# Altium PCB lab_2_pankov_boost.PcbDoc
Units mm, origin at the board's own origin, x right, y up, seen from the top; angles counter-clockwise.
Board outline 50 x 25 mm, 2 copper layers (Top Layer, Bottom Layer), stack 1.57 mm thick; 33 components, 20 nets, 92 pads, 97 vias.
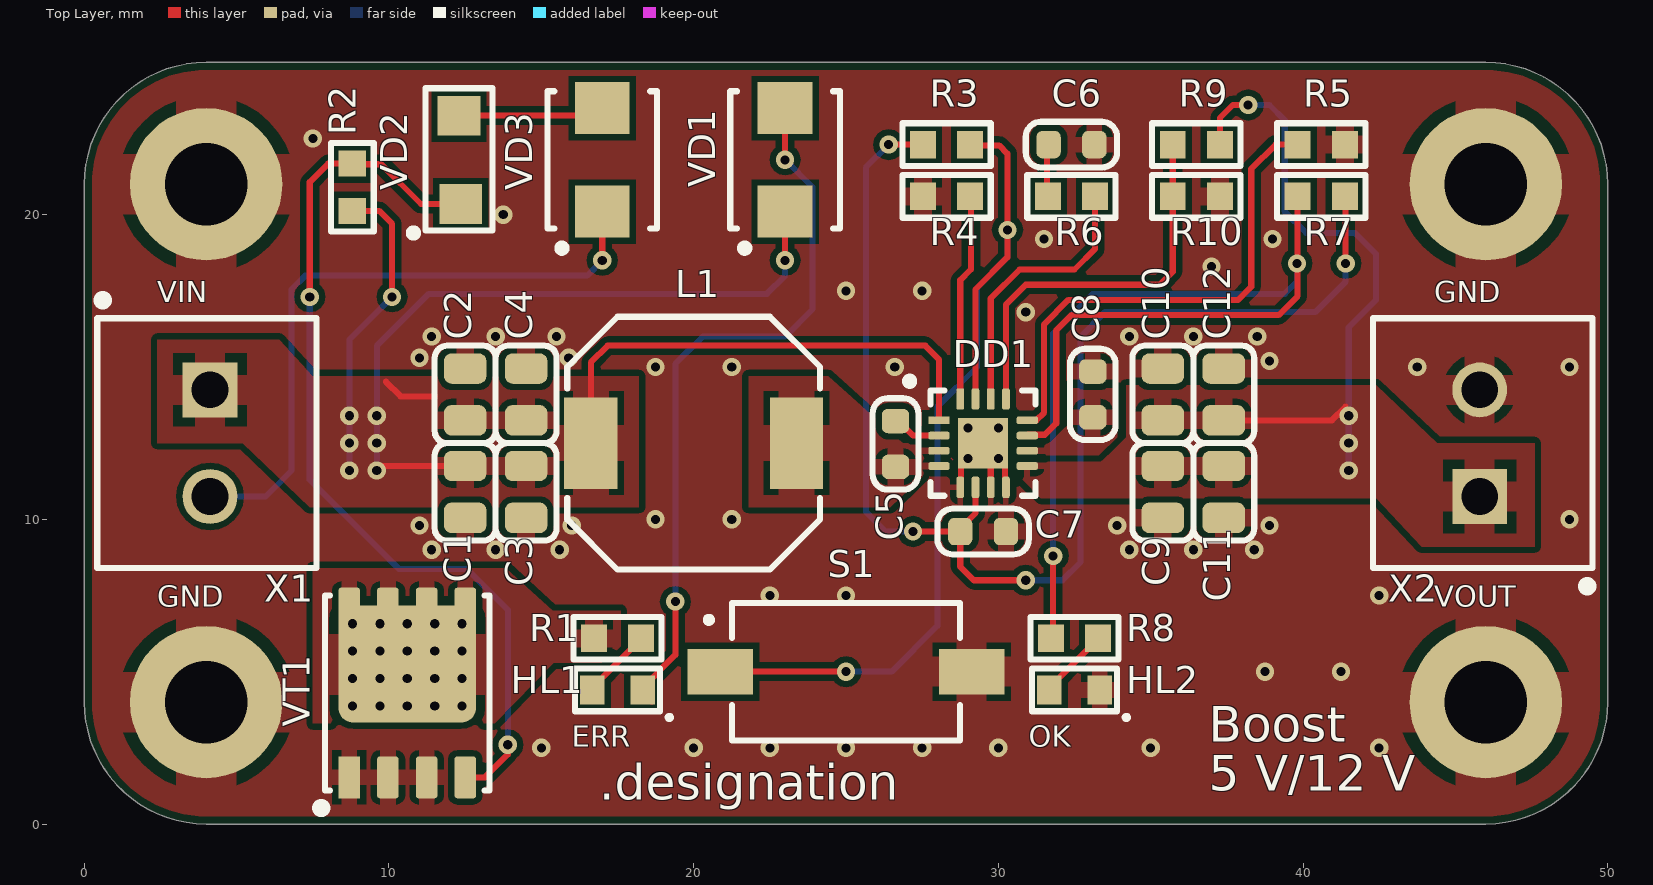
[diagram p0: Top Layer view]
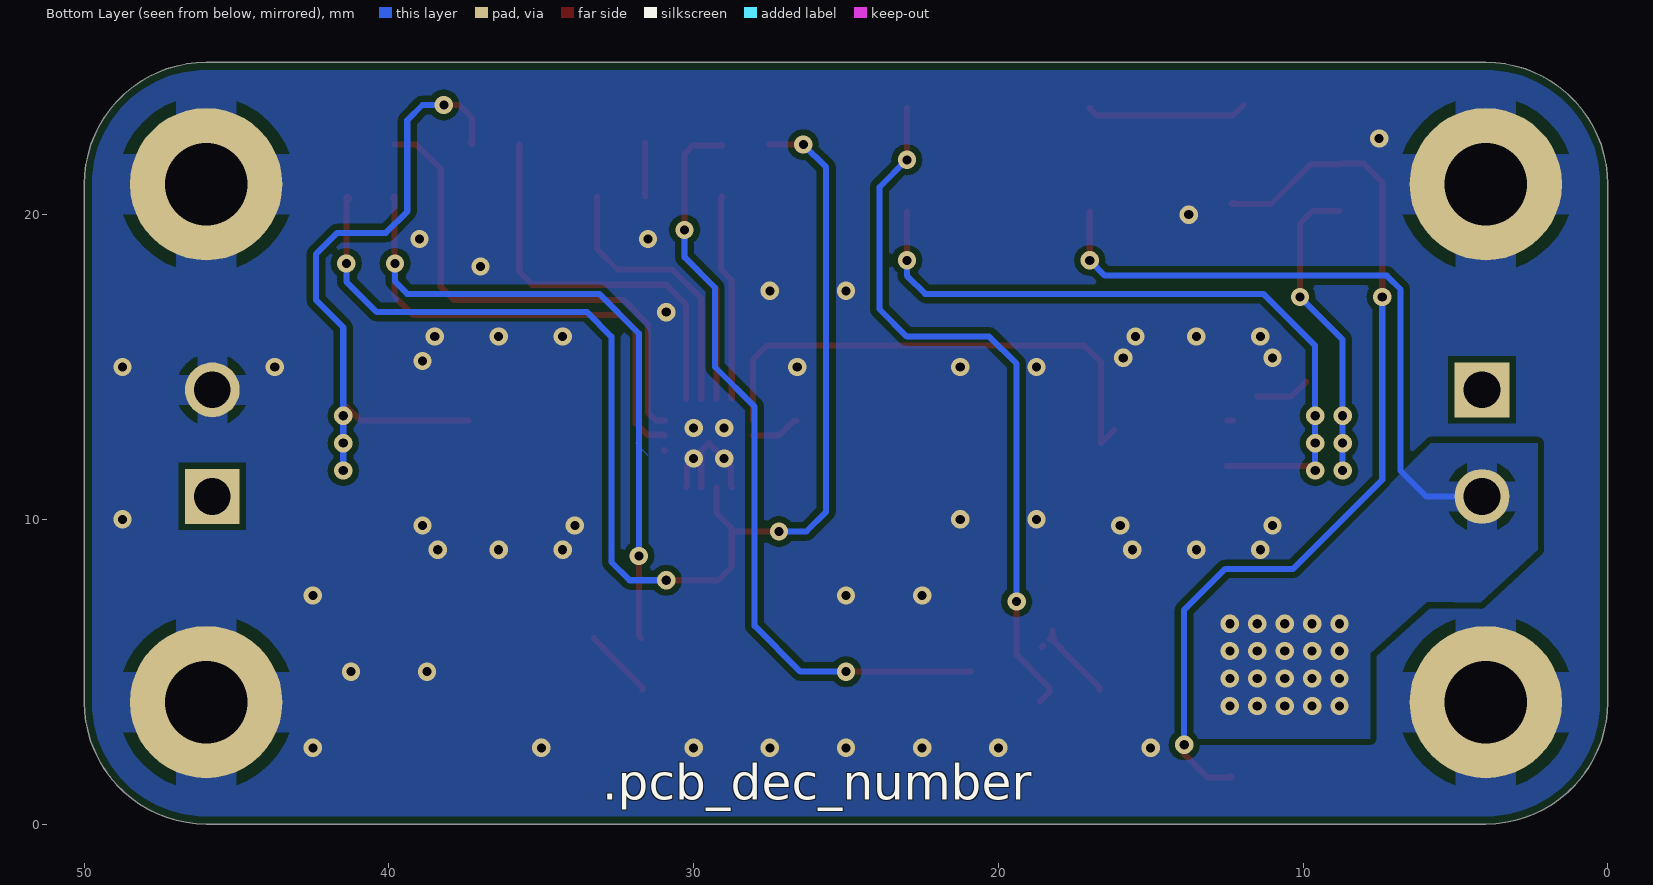
[diagram p1: Bottom Layer view, seen from below]
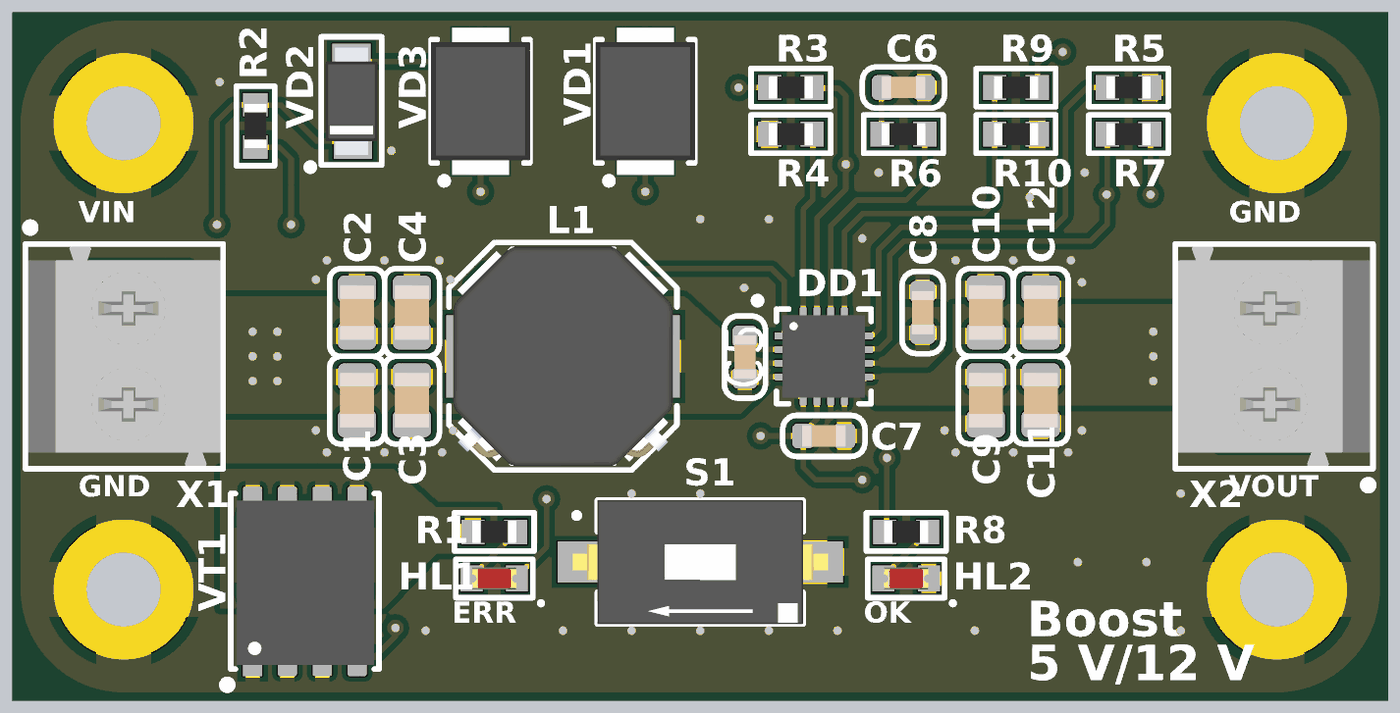
[diagram p2: 3D render of the assembled board from above, using the file's embedded part models]

## Layer stack, top to bottom
Top Solder: solder mask 0.0102, Solder Resist, Dk 3.5
Top Layer: signal copper 0.035
Core 1: core 1.5, FR4, Dk 4.6
Bottom Layer: signal copper 0.035
Bottom Solder: solder mask 0.0102, Solder Resist, Dk 3.5

## Board outline
4,0 cw(c4,4) 0,4 0,21 cw(c4,21) 4,25 46,25 cw(c46,21) 50,21 50,4 cw(c46,4) 46,0

## Design rules (kind name [scope] priority, off if disabled: settings)
AcuteAngle min_acute_angle [OnCopper] p1: minimum=3.50000000000000E+0001 checktracksonly=FALSE // Минимальный угол между примитивами топологии
BoardOutlineClearance board_outline_clearance_std [NOT (OnLayer('Bottom Overlay') OR OnLayer('Top Overlay'))] p1: gap=0.25 ignorepadtopadclearanceinfootprint=FALSE except(0: Arc-SplitContinuation Track-SplitContinuation SMDPad-SplitContinuation THPad-SplitContinuation Via-SplitContinuation Fill-SplitContinuation Poly-SplitContinuation Region-SplitContinuation Text-SplitContinuation) // Отступ элементов топологии от края фрезеруемой печатной платы
Clearance clearance_outer_35um_std [OnTopLayer OR OnBottomLayer] p1: gap=0.2 ignorepadtopadclearanceinfootprint=TRUE except(0.25: Arc-Hole Track-Hole SMDPad-Hole THPad-Hole Via-Hole Fill-Hole Poly-Hole Region-Hole Text-Hole) // Зазоры на внешних слоях
Clearance clearance_inner_35um_std [NOT (OnTopLayer Or OnBottomLayer)] p2: gap=0.2 ignorepadtopadclearanceinfootprint=FALSE except(0.25: Arc-Hole Track-Hole SMDPad-Hole THPad-Hole Via-Hole Fill-Hole Poly-Hole Region-Hole Text-Hole) // Зазоры на внутренних слоях
ComponentClearance [All] p1: gap=0 collisioncheckmode=3 verticalgap=0 showdistances=FALSE
DiffPairsRouting diff_pairs_routing [All] p1: maxlimit=0.127 minlimit=0.127 mostfreqgap=0.127 toplayer_minwidth=0.143 toplayer_maxwidth=0.143 toplayer_prefwidth=0.143 bottomlayer_minwidth=0.143 bottomlayer_maxwidth=0.143 bottomlayer_prefwidth=0.143 impedanceprofiledriven=TRUE maxuncoupledlength=12.7 // Правила трассировки дифференциальных пар
HoleSize min_hole_size_std [IsPad] p1: absolutevalues=TRUE maxlimit=5.9 minlimit=0.6 maxpercent=80.000 minpercent=20.000 // Диаметр межслойного переходного отверстия
HoleSize min_hole_size_via_std [IsVia] p2: absolutevalues=TRUE maxlimit=5.9 minlimit=0.3 maxpercent=80.000 minpercent=20.000 // Минимальный диаметр монтажного отверстия
HoleToHoleClearance hole_to_hole_clearance_std [All] p1: gap=0.2 allowstackedmicrovias=FALSE // Минимальное расстояние между краями двух отверстий
MinimumAnnularRing min_via_ar_std [All] p1: minimumring=0.15 // Поясок площадки переходного отверстия (Annular ring VIA)
MinimumAnnularRing min_pad_ar_std [All] p2: minimumring=0.2 // Поясок монтажной контактной площадки (Annular ring PAD)
MinimumSolderMaskSliver min_solder_mask_bridge_std [All] p1: minsoldermaskwidth=0.15 // Мнимальная ширина масочного мостика
PlaneClearance plane_clearance_35um_std [All] p1: clearance=0.2 // Отступ полигона (для слоя plane) от элементов топологии
PlaneConnect [All] p1: planeconnectstyle=Relief reliefexpansion=0.5 reliefentries=4 reliefconductorwidth=0.2 reliefairgap=0.2
PolygonConnect poly_connect_to_pad<=0.3 [(AsMM(PadXSize_AllLayers)<=0.301) or (AsMM(PadYSize_AllLayers)<=0.301)] p1: thpad.connectstyle=Relief thpad.reliefconductorwidth=0.2 thpad.reliefentries=4 thpad.polygonreliefangle="90 Angle" thpad.airgapwidth=0.2 smdpad.connectstyle=Relief smdpad.reliefconductorwidth=0.2 smdpad.reliefentries=4 smdpad.polygonreliefangle="90 Angle" smdpad.airgapwidth=0.2 via.connectstyle=Direct via.reliefconductorwidth=0.254 via.reliefentries=4 via.polygonreliefangle="90 Angle" via.airgapwidth=0.254 // Правила подключения полигонов для падов от 0,3мм и меньше
PolygonConnect poly_connect_to_pad<=0.4 [(AsMM(PadXSize_AllLayers)<=0.401) or (AsMM(PadYSize_AllLayers)<=0.401)] p2: thpad.connectstyle=Relief thpad.reliefconductorwidth=0.26 thpad.reliefentries=4 thpad.polygonreliefangle="90 Angle" thpad.airgapwidth=0.2 smdpad.connectstyle=Relief smdpad.reliefconductorwidth=0.26 smdpad.reliefentries=4 smdpad.polygonreliefangle="90 Angle" smdpad.airgapwidth=0.2 via.connectstyle=Direct via.reliefconductorwidth=0.254 via.reliefentries=4 via.polygonreliefangle="90 Angle" via.airgapwidth=0.254 // Правила подключения полигонов для падов от 0,4 и меньше
PolygonConnect poly_connect_to_pad<=0.6 [(AsMM(PadXSize_AllLayers)<=0.601) or (AsMM(PadYSize_AllLayers)<=0.601)] p3: thpad.connectstyle=Relief thpad.reliefconductorwidth=0.33 thpad.reliefentries=4 thpad.polygonreliefangle="90 Angle" thpad.airgapwidth=0.2 smdpad.connectstyle=Relief smdpad.reliefconductorwidth=0.33 smdpad.reliefentries=4 smdpad.polygonreliefangle="90 Angle" smdpad.airgapwidth=0.2 via.connectstyle=Direct via.reliefconductorwidth=0.254 via.reliefentries=4 via.polygonreliefangle="90 Angle" via.airgapwidth=0.254 // Правила подключения полигонов для падов от 0,6мм и меньше
PolygonConnect poly_connect_to_pad<=0.7 [(AsMM(PadXSize_AllLayers)<=0.701) or (AsMM(PadYSize_AllLayers)<=0.701)] p4: thpad.connectstyle=Relief thpad.reliefconductorwidth=0.46 thpad.reliefentries=4 thpad.polygonreliefangle="90 Angle" thpad.airgapwidth=0.2 smdpad.connectstyle=Relief smdpad.reliefconductorwidth=0.46 smdpad.reliefentries=4 smdpad.polygonreliefangle="90 Angle" smdpad.airgapwidth=0.2 via.connectstyle=Direct via.reliefconductorwidth=0.254 via.reliefentries=4 via.polygonreliefangle="90 Angle" via.airgapwidth=0.254 // Правила подключения полигонов для падов от 0,7мм и меньше
PolygonConnect poly_connect_to_pad<=0.8 [(AsMM(PadXSize_AllLayers)<=0.8)or(AsMM(PadYSize_AllLayers)<=0.8)] p5: thpad.connectstyle=Relief thpad.reliefconductorwidth=0.53 thpad.reliefentries=4 thpad.polygonreliefangle="90 Angle" thpad.airgapwidth=0.3 smdpad.connectstyle=Relief smdpad.reliefconductorwidth=0.53 smdpad.reliefentries=4 smdpad.polygonreliefangle="90 Angle" smdpad.airgapwidth=0.2 via.connectstyle=Direct via.reliefconductorwidth=0.254 via.reliefentries=4 via.polygonreliefangle="90 Angle" via.airgapwidth=0.254 // Правила подключения полигонов для падов от 0,8мм и меньше
PolygonConnect poly_connect_to_pad<=1 [(AsMM(PadXSize_AllLayers)<=1.01)or(AsMM(PadYSize_AllLayers)<=1.01)] p6: thpad.connectstyle=Relief thpad.reliefconductorwidth=0.6 thpad.reliefentries=4 thpad.polygonreliefangle="90 Angle" thpad.airgapwidth=0.3 smdpad.connectstyle=Relief smdpad.reliefconductorwidth=0.6 smdpad.reliefentries=4 smdpad.polygonreliefangle="90 Angle" smdpad.airgapwidth=0.2 via.connectstyle=Direct via.reliefconductorwidth=0.254 via.reliefentries=4 via.polygonreliefangle="90 Angle" via.airgapwidth=0.254 // Правила подключения полигонов для падов от 1мм и меньше
PolygonConnect poly_connect_to_pad<=1.3 [(AsMM(PadXSize_AllLayers)<=1.31)or(AsMM(PadYSize_AllLayers)<=1.31)] p7: thpad.connectstyle=Relief thpad.reliefconductorwidth=0.66 thpad.reliefentries=4 thpad.polygonreliefangle="90 Angle" thpad.airgapwidth=0.3 smdpad.connectstyle=Relief smdpad.reliefconductorwidth=0.86 smdpad.reliefentries=4 smdpad.polygonreliefangle="90 Angle" smdpad.airgapwidth=0.2 via.connectstyle=Direct via.reliefconductorwidth=0.254 via.reliefentries=4 via.polygonreliefangle="90 Angle" via.airgapwidth=0.254 // Правила подключения полигонов для падов от 1,3мм и меньше
PolygonConnect poly_connect_to_pad<=1.6 [(AsMM(PadXSize_AllLayers)<=1.61)or(AsMM(PadYSize_AllLayers)<=1.61)] p8: thpad.connectstyle=Relief thpad.reliefconductorwidth=0.8 thpad.reliefentries=4 thpad.polygonreliefangle="90 Angle" thpad.airgapwidth=0.3 smdpad.connectstyle=Relief smdpad.reliefconductorwidth=1 smdpad.reliefentries=4 smdpad.polygonreliefangle="90 Angle" smdpad.airgapwidth=0.2 via.connectstyle=Direct via.reliefconductorwidth=0.254 via.reliefentries=4 via.polygonreliefangle="90 Angle" via.airgapwidth=0.254 // Правила подключения полигонов для падов от 1,6мм и меньше
PolygonConnect poly_connect_to_pad<=1.8 [(AsMM(PadXSize_AllLayers)<=1.8)or(AsMM(PadYSize_AllLayers)<=1.8)] p9: thpad.connectstyle=Relief thpad.reliefconductorwidth=1 thpad.reliefentries=4 thpad.polygonreliefangle="90 Angle" thpad.airgapwidth=0.3 smdpad.connectstyle=Relief smdpad.reliefconductorwidth=1.2 smdpad.reliefentries=4 smdpad.polygonreliefangle="90 Angle" smdpad.airgapwidth=0.2 via.connectstyle=Direct via.reliefconductorwidth=0.254 via.reliefentries=4 via.polygonreliefangle="90 Angle" via.airgapwidth=0.254 // Правила подключения полигонов для падов от 1,8мм и меньше
PolygonConnect poly_connect_to_pad<=2 [(AsMM(PadXSize_AllLayers)<=2.01)or(AsMM(PadYSize_AllLayers)<=2.01)] p10: thpad.connectstyle=Relief thpad.reliefconductorwidth=1.1 thpad.reliefentries=4 thpad.polygonreliefangle="90 Angle" thpad.airgapwidth=0.3 smdpad.connectstyle=Relief smdpad.reliefconductorwidth=1.4 smdpad.reliefentries=4 smdpad.polygonreliefangle="90 Angle" smdpad.airgapwidth=0.2 via.connectstyle=Direct via.reliefconductorwidth=0.254 via.reliefentries=4 via.polygonreliefangle="90 Angle" via.airgapwidth=0.254 // Правила подключения полигонов для падов от 2мм и меньше
PolygonConnect poly_connect_to_pad<=2.3 [(AsMM(PadXSize_AllLayers)<=2.31)or(AsMM(PadYSize_AllLayers)<=2.31)] p11: thpad.connectstyle=Relief thpad.reliefconductorwidth=1.2 thpad.reliefentries=4 thpad.polygonreliefangle="90 Angle" thpad.airgapwidth=0.3 smdpad.connectstyle=Relief smdpad.reliefconductorwidth=1.4 smdpad.reliefentries=4 smdpad.polygonreliefangle="90 Angle" smdpad.airgapwidth=0.2 via.connectstyle=Direct via.reliefconductorwidth=0.254 via.reliefentries=4 via.polygonreliefangle="90 Angle" via.airgapwidth=0.254 // Правила подключения полигонов для падов от 2,3мм и меньше
PolygonConnect poly_connect_to_pad<=2.5 [(AsMM(PadXSize_AllLayers)<=2.51)or(AsMM(PadYSize_AllLayers)<=2.51)] p12: thpad.connectstyle=Relief thpad.reliefconductorwidth=1.2 thpad.reliefentries=4 thpad.polygonreliefangle="90 Angle" thpad.airgapwidth=0.3 smdpad.connectstyle=Relief smdpad.reliefconductorwidth=1.4 smdpad.reliefentries=4 smdpad.polygonreliefangle="90 Angle" smdpad.airgapwidth=0.2 via.connectstyle=Direct via.reliefconductorwidth=0.254 via.reliefentries=4 via.polygonreliefangle="90 Angle" via.airgapwidth=0.254 // Правила подключения полигонов для падов от 2,5мм и меньше
PolygonConnect poly_connect_to_pad<=2.7 [(AsMM(PadXSize_AllLayers)<=2.71)or(AsMM(PadYSize_AllLayers)<=2.71)] p13: thpad.connectstyle=Relief thpad.reliefconductorwidth=1.4 thpad.reliefentries=4 thpad.polygonreliefangle="90 Angle" thpad.airgapwidth=0.3 smdpad.connectstyle=Relief smdpad.reliefconductorwidth=1.6 smdpad.reliefentries=4 smdpad.polygonreliefangle="90 Angle" smdpad.airgapwidth=0.2 via.connectstyle=Direct via.reliefconductorwidth=0.254 via.reliefentries=4 via.polygonreliefangle="90 Angle" via.airgapwidth=0.254 // Правила подключения полигонов для падов от 2,7мм и меньше
PolygonConnect poly_connect_to_pad<=3 [(AsMM(PadXSize_AllLayers)<=3.01)or(AsMM(PadYSize_AllLayers)<=3.01)] p14: thpad.connectstyle=Relief thpad.reliefconductorwidth=1.6 thpad.reliefentries=4 thpad.polygonreliefangle="90 Angle" thpad.airgapwidth=0.3 smdpad.connectstyle=Relief smdpad.reliefconductorwidth=1.8 smdpad.reliefentries=4 smdpad.polygonreliefangle="90 Angle" smdpad.airgapwidth=0.2 via.connectstyle=Direct via.reliefconductorwidth=0.254 via.reliefentries=4 via.polygonreliefangle="90 Angle" via.airgapwidth=0.254 // Правила подключения полигонов для падов от 3мм и меньше
PolygonConnect poly_connect_to_pad<=7 [(AsMM(PadXSize_AllLayers)<7.01)or(AsMM(PadYSize_AllLayers)<=7.01)] p15: thpad.connectstyle=Relief thpad.reliefconductorwidth=2 thpad.reliefentries=4 thpad.polygonreliefangle="90 Angle" thpad.airgapwidth=0.4 smdpad.connectstyle=Relief smdpad.reliefconductorwidth=2 smdpad.reliefentries=4 smdpad.polygonreliefangle="90 Angle" smdpad.airgapwidth=0.3 via.connectstyle=Direct via.reliefconductorwidth=0.254 via.reliefentries=4 via.polygonreliefangle="90 Angle" via.airgapwidth=0.254 // Правила подключения полигонов для падов от 7мм и меньше
PolygonConnect poly_connect_to_pad [All] p16: thpad.connectstyle=Relief thpad.reliefconductorwidth=0.25 thpad.reliefentries=4 thpad.polygonreliefangle="90 Angle" thpad.airgapwidth=0.2 smdpad.connectstyle=Relief smdpad.reliefconductorwidth=0.25 smdpad.reliefentries=4 smdpad.polygonreliefangle="90 Angle" smdpad.airgapwidth=0.2 via.connectstyle=Direct via.reliefconductorwidth=0.25 via.reliefentries=4 via.polygonreliefangle="90 Angle" via.airgapwidth=0.2 // Правила подключения полигонов общие
RoutingCorners [All] p1 off: cornerstyle=45-Degree minsetback=2.5 maxsetback=2.5
RoutingVias [All] p1: holewidth=0.3 width=0.6 viastyle="Through Hole" minholewidth=0.3 minwidth=0.6 maxholewidth=5.9 maxwidth=6.4
SilkToSilkClearance silk_to_silk_clearance_std [All] p1 off: silktosilkclearance=0.15 // Отступ текста шелкографии от других примитивов шелкографии
SilkToSolderMaskClearance silk_to_solder_mask_clearance_std [IsPad] p1 off: minsilkscreentomaskgap=0.15 clearancetoexposedcopper=FALSE // Минимальное расстояние между элементами шелкографии и вскрытой медью
SolderMaskExpansion solder_mask_expansion_std [All] p1: expansion=0.05 istentingtop=FALSE // Припуск паяльной масски
UnRoutedNet [All] p1: checkbadconnections=TRUE
Width width_35um_std [All] p1: maxlimit=10 minlimit=0.2 preferedwidth=0.2 checkconnectedcopper=TRUE // Ширина проводников (общая)
19 further rules are at their usual default settings.

## Components (designator, comment, footprint, x,y, rotation, side; value= is the part's Value field where it differs from the comment)
C1 "10 мк" C0805 12.5,10.9 r270 top
C2 "10 мк" C0805 12.5,14.1 r90 top
C3 "10 мк" C0805 14.5,10.9 r270 top
C4 "10 мк" C0805 14.5,14.1 r90 top
C5 "0,22 мк" C0603 26.625,12.475 r90 top
C6 "2200" C0603 32.4,22.3 r180 top
C7 "2,2 мк" C0603 29.5,9.6 r0 top
C8 "1 мк" C0603 33.1,14.1 r90 top
C9 "10 мк" C0805 35.4,10.9 r270 top
C10 "10 мк" C0805 35.4,14.1 r90 top
C11 "10 мк" C0805 37.4,10.9 r270 top
C12 "10 мк" C0805 37.4,14.1 r90 top
DD1 "TPS61378QWRTERQ1" QFN-16-3X3 29.5,12.5 r0 top
HL1 "TLMS1000-GS08" HL0603 17.5,4.4 r180 top
HL2 "TLMG1100-GS08" HL0603 32.5,4.4 r180 top
L1 "DEM8045Z-100M" DEM-2-800X800X450 20,12.5 r0 top
R1 "220" R0603 17.5,6.1 r0 top
R2 "220" R0603 8.8,20.9 r270 top
R3 "10 к" R0603 28.3,22.3 r180 top
R4 "27 к" R0603 28.3,20.6 r180 top
R5 "39 к" R0603 40.6,22.3 r0 top
R6 "100 к" R0603 32.4,20.6 r180 top
R7 "10 к" R0603 40.6,20.6 r0 top
R8 "220" R0603 32.5,6.1 r180 top
R9 "470 к" R0603 36.5,22.3 r180 top
R10 "33 к" R0603 36.5,20.6 r0 top
S1 "SDA01H1SBD" DIP-SWITCH-01-452X930X545 25,5 r0 top
VD1 "SS36-E3/57T" DO-214AB 23,21.8 r90 top
VD2 "BZD17C9V1P" DO-219AB 12.3,21.8 r90 top
VD3 "SS36-E3/57T" DO-214AB 17,21.8 r90 top
VT1 "CSD19532Q5B" SON-8 10.6,4.3 r0 top
X1 "1776275-2" 1776275-2 4.025,12.5 r270 top
X2 "1776275-2" 1776275-2 45.9,12.5 r90 top

## Footprints (in the part's own frame and the unit in brackets; to place one, negate y for a bottom-side part, rotate by r counter-clockwise, add the part's x,y. Pads: shape width x height; smd on the part's side, far side on the other; paste and mask are expansions set on the pad)
1776275-2 [mm] "PCB Terminal Blocks, Header, Wire-to-Board, 2 Position, 3.5mm [.138in] Centerline, 1 Row, Side Wire Entry Angle, 26 – 18AWG Wire Size"
  rect 1.8x1.8 hole 1.2: 1(-1.75,0.1)
  round 1.8 hole 1.2: 2(1.75,0.1)
  silkscreen extent -4.7,-3.6 4.1,3.6, body extent -4,-3.5 4,3.5, height 8.3
C0603 [mm] "Chip Capacitor, 2-Leads, Body 1,60x0,80mm, IPC Medium Density"
  rrect50% 0.8x0.9 smd: 1(-0.75,0) 2(0.75,0)
  silkscreen extent -1.5,-0.75 1.5,0.75, body extent -0.8,-0.4 0.8,0.4, height 0.8
C0805 [mm] "Chip Capasitor, 2-Leads, Body 2,00x1,25mm, IPC Medium Density"
  rrect50% 1x1.4 smd: 1(-0.85,0) 2(0.85,0)
  silkscreen extent -1.6,-1 1.6,1, body extent -1,-0.62 1,0.63, height 0.6
DEM-2-800X800X450 [mm] "Precision Wire Wound Inductor, 2-Leads, Body 8,00x8,00mm, IPC Medium Density"
  rect 1.75x3 smd: 1(-3.375,0) 2(3.375,0)
  silkscreen extent -4.15,-4.15 4.15,4.15, body extent -4,-4 4,4, height 4.5
DIP-SWITCH-01-452X930X545 [mm]
  rect 2.15x1.5 smd: 1(-4.125,0) 2(4.125,0)
  silkscreen extent -4.6,-2.26 3.74,2.26, body extent -4.65,-2.26 4.65,2.26, height 5.44
DO-214AB [mm] "Molded Diode, 2-Leads, Body 6,86x5,91mm, IPC Medium Density"
  rect 1.7x1.8 smd: 1(-1.7,0) 2(1.7,0)
  silkscreen extent -3.02,-1.8 2.25,1.8, body extent -2.7,-1.81 2.7,1.81, height 2.43
DO-219AB [mm]
  rect 1.3x1.4 smd: 1(-1.45,-0.05) 2(1.45,0)
  silkscreen extent -2.45,-1.1 2.35,1.55, body extent -1.95,-0.95 1.95,0.95, height 1.25
HL0603 [mm] "Chip Diode, 2-Leads, Body 1,60x0,80mm, IPC Medium Density"
  rect 0.8x0.95 smd: 1(-0.825,0) 2(0.825,0)
  silkscreen extent -1.75,-0.7 1.4,0.95, body extent -0.81,-0.4 0.81,0.4, height 0.6
QFN-16-3X3 [mm] "QFN, 16-Leads, Body 3,00x3,00mm, Pitch 0,50mm, Thermal Pad 1,65x1,65mm, IPC Medium Density"
  rect 1.65x1.65 smd: 0(0,0)
  rect 0.7x0.25 smd: 1(-1.45,0.75)
  rrect50% 0.7x0.25 smd: 2(-1.45,0.25) 3(-1.45,-0.25) 4(-1.45,-0.75) 9(1.45,-0.75) 10(1.45,-0.25) 11(1.45,0.25) 12(1.45,0.75)
  rrect50% 0.25x0.7 smd: 5(-0.75,-1.45) 6(-0.25,-1.45) 7(0.25,-1.45) 8(0.75,-1.45) 13(0.75,1.45) 14(0.25,1.45) 15(-0.25,1.45) 16(-0.75,1.45)
  silkscreen extent -2.54,-1.73 1.73,2.16, body extent -1.5,-1.5 1.5,1.5, height 0.8
R0603 [mm] "Chip Resistor, 2-Leads, Body 1,60x0,80mm, IPC Medium Density"
  rect 0.85x0.9 smd: 1(-0.775,0) 2(0.775,0)
  silkscreen extent -1.45,-0.7 1.45,0.7, body extent -0.8,-0.4 0.8,0.4, height 0.45
SON-8 [mm]
  rrect25% 0.71x1.372 smd paste-10: D(-1.905,2.77) D(-0.635,2.77) D(0.635,2.77) D(1.905,2.77)
  rrect25% 4.52x3.85 smd paste-10: D(0,0.95)
  rrect25% 0.71x1.372 smd paste-0.002: G(1.905,-2.77) S(-0.635,-2.77) S(0.635,-2.77)
  rect 0.71x1.372 smd paste-0.002: S(-1.905,-2.77)
  silkscreen extent -2.83,-3.78 2.7,3.2, body extent -2.48,-3.05 2.52,2.95, height 1.05

## Part data
C1 C2 C3 C4 C9 C10 C11 C12: library part c0091, "=Описание", HelpURL=https://www.yageo.com/upload/media/product/productsearch/datasheet/mlcc/UPY-GPHC_X5R_4V-to-50V_26.pdf, ID=c0091, Корпус=0805, Наименование=CC0805KRX5R9BB106, Напряжение="50 В", Номинал="10 мк", Номинальное напряжение="50 В", Описание="Конденсатор чип 0805 10 мкФ 50 В ±10 %", Отклонение="±10 %", Производитель="YAGEO Corp.", Рабочие температуры="от –55 °С до +85 °С", Температурный коэффициент емкости=X5R, Фамилия=Паньков
C5 C8: library part c0041, "=Описание", HelpURL=https://www.yageo.com/upload/media/product/productsearch/datasheet/mlcc/UPY-GPHC_X5R_4V-to-50V_26.pdf, Корпус=0603, Напряжение="50 В", Номинальное напряжение="50 В", Отклонение="±10 %", Производитель="YAGEO Corp.", Рабочие температуры="от –55 °С до +85 °С", Температурный коэффициент емкости=X5R
  C5: ID=c0041, Наименование=CC0603KRX5R9BB224, Номинал="0,22 мк", Описание="Конденсатор чип 0603 220 нФ 50 В ±10 %", Фамилия=Паньков
  C8: ID=c0061, Наименование=CC0603KPX5R9BB105, Номинал="1 мк", Описание="Конденсатор чип 0603 1 мкФ 50 В ±10 %", Фамилия=Самарин
C6: library part c0019, "=Описание", HelpURL=https://www.yageo.com/upload/media/product/products/datasheet/mlcc/UPY-GPHC_X7R_6.3V-to-50V_20.pdf, ID=c0019, Корпус=0603, Наименование=CC0603KRX7R9BB222, Напряжение="50 В", Номинал=2200, Номинальное напряжение="50 В", Описание="Конденсатор чип 0603 2,2 нФ 50 В ±10 %", Отклонение="±10 %", Производитель="YAGEO Corp.", Рабочие температуры="от –55 °С до +125 °С", Температурный коэффициент емкости=X7R, Фамилия=Паньков
C7: library part c0071, "=Описание", HelpURL=https://www.yageo.com/upload/media/product/productsearch/datasheet/mlcc/UPY-GPHC_X5R_4V-to-50V_26.pdf, ID=c0071, Корпус=0603, Наименование=CC0603KRX5R9BB225, Напряжение="50 В", Номинал="2,2 мк", Номинальное напряжение="50 В", Описание="Конденсатор чип 0603 2,2 мкФ 50 В ±10 %", Отклонение="±10 %", Производитель="YAGEO Corp.", Рабочие температуры="от –55 °С до +85 °С", Температурный коэффициент емкости=X5R, Фамилия=Самарин
DD1: library part dd0001, "=Описание", HelpURL=https://www.ti.com/product/TPS61378-Q1, ID=dd0001, Входное напряжение="от 2,3 В до 14 В", Выходное напряжение="от 4 В до 18,5 В", Коммутируемый ток="от 1 А до 4,8 А", Корпус="QFN-16 (3 x 3)", Наименование=TPS61378QWRTERQ1, Описание="Повышающий преобразователь напряжения 18,5 В и 4,8 А", Производитель="Texas Instruments", Рабочие температуры="от -40 °С до +125 °С", Фамилия=Паньков, Частота переключения="от 200 кГц до 2,2 МГц"
HL1: library part hl0001, "=Описание", HelpURL=https://www.vishay.com/leds/list/product-83172/, ID=hl0001, Корпус=0603, Наименование=TLMS1000-GS08, Номинальная длина волны="628 нм", Номинальная сила света="4 мкд", Номинальное падение напряжения="1,8 В", Номинальный прямой ток="15 мА", Описание="Светодиод чип 0603 красный", Производитель="Vishay Intertechnology, Inc.", Рабочие температуры="от -40 °С до +100 °С", Рассеиваемая мощность="40 мВт", Фамилия=Ларионов, Цвет=Red
HL2: library part hl0005, "=Описание", HelpURL=https://www.vishay.com/leds/list/product-83173/, ID=hl0005, Корпус=0603, Наименование=TLMG1100-GS08, Номинальная длина волны="570 нм", Номинальная сила света="35 мкд", Номинальное падение напряжения="2,1 В", Номинальный прямой ток="30 мА", Описание="Светодиод чип 0603 зеленый", Производитель="Vishay Intertechnology, Inc.", Рабочие температуры="от -40 °С до +100 °С", Рассеиваемая мощность="90 мВт", Фамилия=Ларионов, Цвет=Green
L1: library part l0005, "=Описание", HelpURL=https://www.murata.com/en-us/products/productdetail?partno=DEM8045Z-100M%23, ID=l0005, Индуктивность="10 мкГн", Корпус="8,0 x 8,0 x 4,5", Максимальное активное сопротивление="39,6 мОм", Наименование=DEM8045Z-100M, Номинал="10 мкГн", Номинальное активное сопротивление="33 мОм", Номинальный ток (при нагреве на 20 °С/40 °С)="3,9 А", Описание="Катушка индуктивности 10 мкГн ±20 %", Отклонение="±20 %", Производитель="Murata Manufacturing Co., Ltd.", Рабочее напряжение="не указано", Рабочие температуры="от –40 °С до +125 °С", Резонансная частота="24 МГц", Ток насыщения="4,3 А", Фамилия=Паньков
R1 R2 R8: library part r0009, "=Описание", HelpURL=https://www.yageo.com/upload/media/product/productsearch/datasheet/rchip/PYu-RC_Group_51_RoHS_L_11.pdf, ID=r0009, Корпус=0603, Наименование=RC0603FR-07220RL, Номинал=220, Номинальное напряжение="75 В", Номинальный ток="1 А", Описание="Резистор чип 0603 220 Ом ±1 % 0,1 Вт", Отклонение="±1 %", Производитель="YAGEO Corp.", Рабочие температуры="от -55 °С до +155 °С", Фамилия=Ларионов
R3 R7: library part r0013, "=Описание", HelpURL=https://www.yageo.com/upload/media/product/productsearch/datasheet/rchip/PYu-RC_Group_51_RoHS_L_11.pdf, ID=r0013, Корпус=0603, Наименование=RC0603FR-0710KL, Номинал="10 к", Номинальное напряжение="75 В", Номинальный ток="1 А", Описание="Резистор чип 0603 10 кОм ±1 % 0,1 Вт", Отклонение="±1 %", Производитель="YAGEO Corp.", Рабочие температуры="от -55 °С до +155 °С", Фамилия=Самарин
R4: library part r0054, "=Описание", HelpURL=https://www.yageo.com/upload/media/product/productsearch/datasheet/rchip/PYu-RC_Group_51_RoHS_L_11.pdf, ID=r0054, Корпус=0603, Наименование=RC0603FR-0727KL, Номинал="27 к", Номинальное напряжение="75 В", Номинальный ток="1 А", Описание="Резистор чип 0603 27 кОм ±1 % 0,1 Вт", Отклонение="±1 %", Производитель="YAGEO Corp.", Рабочие температуры="от -55 °С до +155 °С", Фамилия=Паньков
R5: library part r0058, "=Описание", HelpURL=https://www.yageo.com/upload/media/product/productsearch/datasheet/rchip/PYu-RC_Group_51_RoHS_L_11.pdf, ID=r0058, Корпус=0603, Наименование=RC0603FR-0739KL, Номинал="39 к", Номинальное напряжение="75 В", Номинальный ток="1 А", Описание="Резистор чип 0603 39 кОм ±1 % 0,1 Вт", Отклонение="±1 %", Производитель="YAGEO Corp.", Рабочие температуры="от -55 °С до +155 °С", Фамилия=Паньков
R6: library part r0094, "=Описание", HelpURL=https://www.yageo.com/upload/media/product/productsearch/datasheet/rchip/PYu-RC_Group_51_RoHS_L_11.pdf, ID=r0094, Корпус=0603, Наименование=RC0603FR-07100KL, Номинал="100 к", Номинальное напряжение="75 В", Номинальный ток="1 А", Описание="Резистор чип 0603 100 кОм ±1 % 0,1 Вт", Отклонение="±1 %", Производитель="YAGEO Corp.", Рабочие температуры="от –55 °С до +155 °С", Фамилия=Водорезов
R9: library part r0095, "=Описание", HelpURL=https://www.yageo.com/upload/media/product/productsearch/datasheet/rchip/PYu-RC_Group_51_RoHS_L_11.pdf, ID=r0095, Корпус=0603, Наименование=RC0603FR-07470KL, Номинал="470 к", Номинальное напряжение="75 В", Номинальный ток="1 А", Описание="Резистор чип 0603 470 кОм ±1 % 0,1 Вт", Отклонение="±1 %", Производитель="YAGEO Corp.", Рабочие температуры="от -55 °С до +155 °С", Фамилия=Паньков
R10: library part r0056, "=Описание", HelpURL=https://www.yageo.com/upload/media/product/productsearch/datasheet/rchip/PYu-RC_Group_51_RoHS_L_11.pdf, ID=r0056, Корпус=0603, Наименование=RC0603FR-0733KL, Номинал="33 к", Номинальное напряжение="75 В", Номинальный ток="1 А", Описание="Резистор чип 0603 33 кОм ±1 % 0,1 Вт", Отклонение="±1 %", Производитель="YAGEO Corp.", Рабочие температуры="от -55 °С до +155 °С", Фамилия=Паньков
S1: library part sw0002, "=Описание", HelpURL=https://www.ckswitches.com/products/switches/product-details/DIP/SDA/SDA01H1SBD/, ID=sw0002, Количество контактов=2, Корпус=4,52х9,30х5,45, Наименование=SDA01H1SBD, Описание="2-х позиционный движковый переключатель", Производитель=C&K, Промывка=Разрешена, Рабочие температуры="от -40 °С до +85 °С", Сопротивление контакта="50 мОм", Ток нагрузки="100 мА @ 5 В", Фамилия=Паньков
VD1 VD3: library part vd0004, "=Описание", HelpURL=https://www.vishay.com/product?docid=88751, ID=vd0004, Импульсное обратное напряжение="60 В", Корпус=DO-214AB, Макс допустимый средний прямой ток="3 А", Наименование=SS36-E3/57T, Описание="Диод Шоттки 60 В 3 А", Пиковое прямое напряжение="0,75 В", Производитель="Vishay Intertechnology, Inc.", Рабочие температуры="от –55 °С до +150 °С", Фамилия=Жернаков
VD2: library part vd0011, "=Описание", HelpURL=https://www.vishay.com/product?docid=85161, ID=vd0011, Корпус=DO-219AB, Наименование=BZD17C9V1P, Номинальное напряжение стабилизации="9,1 В", Номинальный ток стабилизации="50 мА", Описание="Стабилитрон 9,1 В", Производитель="Vishay Intertechnology, Inc.", Рабочие температуры="от –55 °С до +150 °С", Разброс напряжения стабилизации="8,5...9,6 В", Фамилия=Паньков
VT1: library part vt0001, "=Описание", HelpURL=https://www.ti.com/lit/ds/symlink/csd19532q5b.pdf, ID=vt0001, Корпус=SON-8, Наименование=CSD19532Q5B, Напряжение затвор — исток="±20 В", Напряжение сток — исток="100 В", Описание="Транзистор полевой N-канальный 100 В 17 А", Производитель="Texas Instruments", Рабочие температуры="от –55 °С до +150 °С", Сопротивление сток — исток="0,0057 Ом", Ток стока="17 А", Фамилия=Жернаков
X1 X2: library part x0005, "=Описание", Contact_2=GND, ID=x0005, Наименование=1776275-2, Описание="Клеммная колодка с 2 выводами с шагом 3,5 мм", Производитель="TE Connectivity", Фамилия=Паньков
  X1: Contact_1=VIN
  X2: Contact_1=VOUT

## Free pads (board coordinates)
  round 5 hole 2.7: 2(4,4) 2(4,21) 2(46,4) 2(46,21)

## Via types
v1: diameter 0.6, hole 0.3, Top Layer to Bottom Layer, tented both sides, 73 vias
v2: diameter 0.6, hole 0.3, Top Layer to Bottom Layer, 24 vias

## Nets (pads, with @x,y where several pads share a name; then routed paths per layer and width w, separated by ;. In a path a pad name is that pad's centre, name@x,y a point inside that pad or via, vN(x,y) a via of type N, cw(c..) or ccw(c..) an arc to the next point about the centre after c; other vN are vias at no path point)
COMP: DD1.14 R6.1 | length 9.1
  Top Layer w0.2: DD1.14 29.75,17.25 30.7,18.2 32.5,18.2 33.175,18.875 R6.1
EN: DD1.15 R3.1 S1.1 | length 31.5
  Top Layer w0.2: S1.1 v1(25,5) ; R3.1 29.075,22.275 30.025,22.275 30.3,22 v1(30.3,19.5) 30.3,18.6 29.25,17.55 DD1.15
  Bottom Layer w0.2: v1(25,5) 26.5,5 28,6.5 28,13.7 29.3,15 29.3,17.6 30.3,18.6 v1(30.3,19.5)
FB: DD1.13 R9.2 R10.1 | length 13.2
  Top Layer w0.2: DD1.13 30.25,17.05 30.9,17.7 35.3,17.7 35.725,18.125 R10.1 R9.2 R9.2@35.7,22.275
FREQ: DD1.16 R4.1 | length 6.8
  Top Layer w0.2: DD1.16 28.75,17.85 29.1,18.2 29.1,20.525 29.05,20.575 R4.1
GND_IN: R1.1 VD3.1 VT1.D X1.2 | length 21.2
  Top Layer w0.2: v1(17,18.5) VD3.1
  Bottom Layer w0.2: X1.2 5.95,10.75 6.8,11.6 6.8,17.549 7.251,18 16.5,18 v1(17,18.5)
  other v2: 8.8,3.875 9.7,3.875 10.6,3.875 11.5,3.875 12.4,3.875 8.8,4.775 9.7,4.775 10.6,4.775 11.5,4.775 12.4,4.775 8.8,5.675 9.7,5.675 10.6,5.675 11.5,5.675 12.4,5.675 8.8,6.575 9.7,6.575 10.6,6.575 11.5,6.575 12.4,6.575
GND_OUT: C1.2 C2.2 C3.2 C4.2 C6.1 C7.2 C8.2 C9.2 C10.2 C11.2 C12.2 DD1.0 DD1.5 DD1.7 DD1.8 HL2.1 pad.2 R4.2 R5.2 R10.2 S1.2 VT1.S X2.2 | length 4.7
  Top Layer w0.2: DD1.5 28.775,11.075 28.775,11.775 DD1.0 DD1.0@29.75,12.25 ; DD1.7 DD1.0@29.75,12.25 ; DD1.8 30.225,11.075 30.225,11.775 DD1.0@29.75,12.25
  other v1: 15,2.5 20,2.5 22.5,2.5 25,2.5 27.5,2.5 30,2.5 35,2.5 42.5,2.5 38.75,5 41.25,5 22.5,7.5 25,7.5 42.5,7.5 11.4,9 13.5,9 15.6,9 34.3,9 36.4,9 38.4,9 11,9.8 16,9.8 33.9,9.8 38.9,9.8 18.75,10 21.25,10 48.75,10 18.75,15 21.25,15 26.6,15 43.75,15 48.75,15 38.9,15.2 11,15.3 15.9,15.3 11.4,16 13.5,16 15.5,16 34.3,16 36.4,16 38.5,16 30.9,16.8 25,17.5 27.5,17.5 37,18.3 31.5,19.2 39,19.2 13.75,20 7.5,22.5
  other v2: 29,12 30,12 29,13 30,13
ILIM: DD1.12 R5.1 | length 16.6
  Top Layer w0.2: DD1.12 31.25,13.25 31.5,13.5 31.5,16.4 32.3,17.2 37.867,17.2 38.3,17.633 38.3,21.5 39.1,22.3 R5.1
NetC5_2: C5.2 DD1.2 | length 1.6
  Top Layer w0.2: C5.2 26.729,13.225 27.204,12.75 DD1.2
NetC6_2: C6.2 R6.2 | length 1.8
  Top Layer w0.2: R6.2@31.575,20.6 31.6,20.625 C6.2@31.6,22.35
NetHL1_1: HL1.1 VD1.2 | length 23.9
  Top Layer w0.2: HL1.1@18.625,4.025 18.325,4.325 HL1.1 18.325,4.475 19.4,5.55 v1(19.4,7.3) ; v1(23,21.8) VD1.2
  Bottom Layer w0.2: v1(19.4,7.3) 19.4,15.1 20.3,16 23,16 23.9,16.9 23.9,20.9 v1(23,21.8)
NetHL1_2: HL1.2 R1.2 | length 2.8
  Top Layer w0.2: HL1.2 16.675,4.475 17.95,5.75 17.95,5.775 R1.2 R1.2@18.325,6.05 ; R1.2@18.175,6.1 R1.2@18.225,6.05 ; R1.2@18.225,6.1 R1.2@18.225,6.35 ; R1.2@18.525,5.85 R1.2@18.575,5.8
NetHL2_2: HL2.2 R8.1 | length 2.4
  Top Layer w0.2: HL2.2 31.675,4.475 32.95,5.75 32.95,5.775 R8.1
NetR2_1: R2.1 VD2.1 VT1.G | length 30.5
  Top Layer w0.2: v1(7.4,17.3) 7.4,21.067 8.008,21.675 R2.1 8.819,21.656 9.744,21.656 11.05,20.35 VD2.1 VD2.1@12.3,20.4 ; VT1.G@12.385,1.575 12.34,1.53 VT1.G 13.145,1.53 13.9,2.285 v1(13.9,2.6)
  Bottom Layer w0.2: v1(7.4,17.3) 7.4,11.3 10.325,8.375 12.55,8.375 13.9,7.025 v1(13.9,2.6)
NetVD2_2: VD2.2 VD3.2 | length 5.3
  Top Layer w0.2: VD2.2@11.95,23.6 VD2.2 16.75,23.25 VD3.2
OUT: C8.1 DD1.10 | length 0
  Top Layer w0.2: DD1.10 DD1.10@30.975,12.275
PGOOD: DD1.11 R7.1 R8.2 | length 35.2
  Top Layer w0.2: DD1.11 30.975,12.775 31.525,12.775 31.9,13.15 31.9,16.2 32.4,16.7 39.2,16.7 39.825,17.325 R7.1 R7.1@39.875,20.55 ; R8.2 31.8,6.175 v1(31.8,8.8)
  Bottom Layer w0.2: v1(31.8,8.8) 31.8,16.1 33.1,17.4 39.4,17.4 39.8,17.8 v1(39.8,18.4)
SW: C5.1 DD1.3 DD1.4 L1.2
V_IN: C1.1 C2.1 C3.1 C4.1 DD1.1 L1.1 R2.2 VD1.1 X1.1 | length 52.7
  Top Layer w0.2: R2.2 9.675,20.125 10.1,19.7 v1(10.1,17.3) ; v1@9.65,11.75 C1.1 ; 9.9,14.517 10.38,14.037 11.513,14.037 ; C2.1@12.3,13.25 C2.1 ; L1.1@16.2,12.925 L1.1 16.625,15.15 17.175,15.7 27.6,15.7 28.05,15.25 DD1.1 ; v1(23,18.5) VD1.1
  Bottom Layer w0.2: v1(8.7,11.6) v1(8.7,12.5) v1(8.7,13.4) 8.7,15.9 v1(10.1,17.3) ; v1(9.6,11.6) v1(9.6,12.5) v1(9.6,13.4) 9.6,15.7 11.3,17.4 22.4,17.4 23,18 v1(23,18.5)
V_OUT: C9.1 C10.1 C11.1 C12.1 DD1.9 R9.1 X2.1 | length 21.7
  Top Layer w0.2: R9.1@37.325,22.35 R9.1 37.275,23.175 37.7,23.6 v1(38.2,23.6) ; C12.1 40.95,13.25 41.4,13.7
  Bottom Layer w0.2: v1(38.2,23.6) 38.9,23.6 39.4,23.1 39.4,20.1 40.1,19.4 41.7,19.4 42.4,18.7 42.4,17.2 41.5,16.3 v1(41.5,13.4) v1(41.5,12.5) v1(41.5,11.6)
VCC: C7.1 DD1.6 R3.2 R7.2 | length 43.8
  Top Layer w0.2: v1(26.4,22.3) R3.2 ; v1(27.2,9.6) C7.1 ; DD1.6 29.25,10.204 28.75,9.704 C7.1 ; v1(30.9,8) 29.2,8 28.75,8.45 C7.1 ; R7.2@41.3,20.525 R7.2 41.4,20.575 v1(41.4,18.4)
  Bottom Layer w0.2: v1(26.4,22.3) 25.65,21.55 25.65,10.25 26.3,9.6 v1(27.2,9.6) ; v1(30.9,8) 32.1,8 32.7,8.6 32.7,16 33.5,16.8 40.4,16.8 41.4,17.8 v1(41.4,18.4)

## Polygon pours and split planes (outlines as drawn)
GND_OUT on Bottom Layer "Bottom Layer-GND_OUT" (solid, pour order 66): 0,25 0,0 50,0 50,25
GND_IN on Bottom Layer "Bottom Layer-GND_IN" (solid, pour order 64): 2.3,9 4.181,7.27 5.922,7.29 7.8,5.6 7.8,2.8 13.7,2.8 13.7,6.95 12.462,8.1 11.313,8.1 10.2,8.1 7,11.3 5.8,12.5 2.3,12.5
no net on Bottom Layer "Bottom Layer-No Net" (solid, pour order 34): 31.5,12.1 31.9,12.5
GND_OUT on Top Layer "Top Layer-GND" (solid, pour order 58): 0,0 0,25 50,25 50,0
V_IN on Top Layer "Top Layer-VIN" (solid, pour order 44): 18.2,14.7 18.2,10.4 7.4,10.4 5.2,12.5 2.4,12.5 2.4,15.9 6.4,15.9 7.491,14.7
GND_IN on Top Layer "Top Layer-GND_IN 1" (solid, pour order 68): 7.5,8.4 7.5,3.3 13.474,3.3 15.4,5.3 17.6,5.3 17.6,7 16.6,7 15.38,7 13.84,8.4
V_OUT on Top Layer "Top Layer-VOUT" (solid, pour order 46): 34.2,14.4 34.2,12.7 33.6,12.1 30.5,12.1 30.5,11.6 31.4,10.7 33.4,10.7 34.2,10.7 42.4,10.7 43.9,9.1 44.4,9.1 47.6,9.1 47.6,12.5 44.4,12.5 42.4,14.4
SW on Top Layer "Top Layer-SW" (solid, pour order 42): 21.8,14.7 21.8,10.4 26.456,10.4 27.1,11 27.498,11.398 28.5,11.4 28.5,12.494 27.503,12.494 26.873,12.494 26,13.28 24.422,14.7
OUT on Top Layer "Top Layer-NetC8_1" (solid, pour order 36): 30.5,12.5 30.5,12.1 33.3,12.1 33.9,12.7 33.9,14.3 32.278,14.3 32.278,13.081 31.6,12.5
no net on Top Layer "Top Layer-No Net" (solid, pour order 40): 28.5,11.95 28.45,12

## Silkscreen, mask and mechanical layers (free items; w line width, h text height)
Top Overlay:
  text "VIN" at 2.4,16.9 h1.2
  text "GND" at 44.3,16.9 h1.2
  text "GND" at 2.4,6.9 h1.2
  text "VOUT" at 44.3,6.9 h1.2
  text "ERR" at 16,2.3 h1.2
  text "OK" at 31,2.3 h1.2
  text "Boost" at 36.9,2.3 h2
  text "5 V/12 V" at 36.9,0.7 h2
  text ".designation" at 16.9,0.4 h2
Bottom Overlay:
  text ".pcb_dec_number" at 33,0.4 h2
Board:
  the board outline again, w0.1
Assembly Notes (Mech5):
  text "'.title'" at 0,-2.5 h2
  text "'.project'_'.pcb_dec_number'['.Pcb_File_Name_No_Path']" at 0,-5 h2